# Altium PCB PCB1.PcbDoc (part 1 of 2)
Units mm, origin at the board's own origin, x right, y up, seen from the top; angles counter-clockwise.
Board outline 100.58 x 99.31 mm, 2 copper layers (Top Layer, Bottom Layer); 150 components, 13 nets, 389 pads, 0 vias.
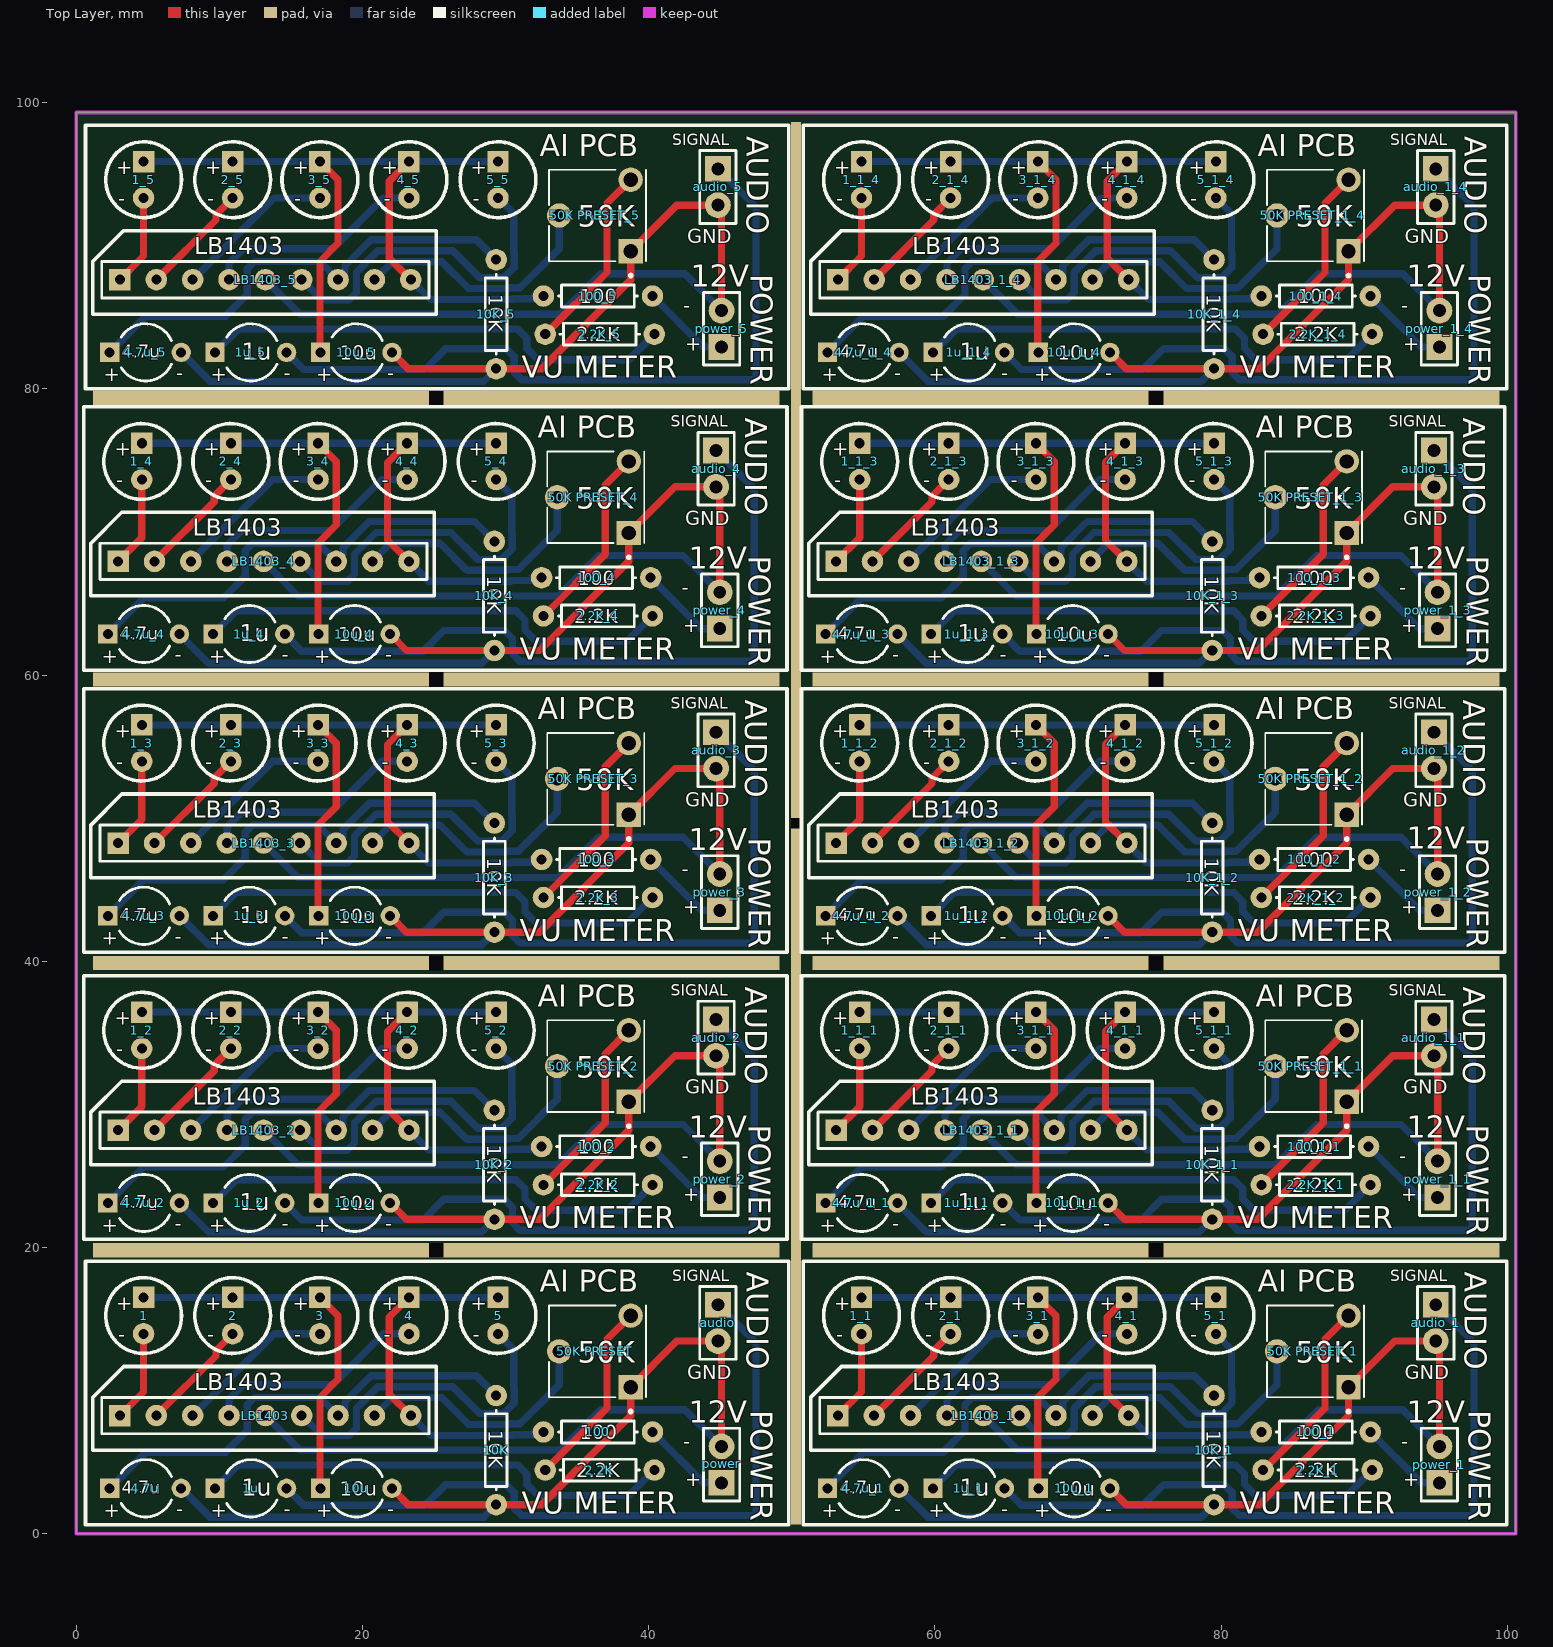
[diagram p0: Top Layer view]
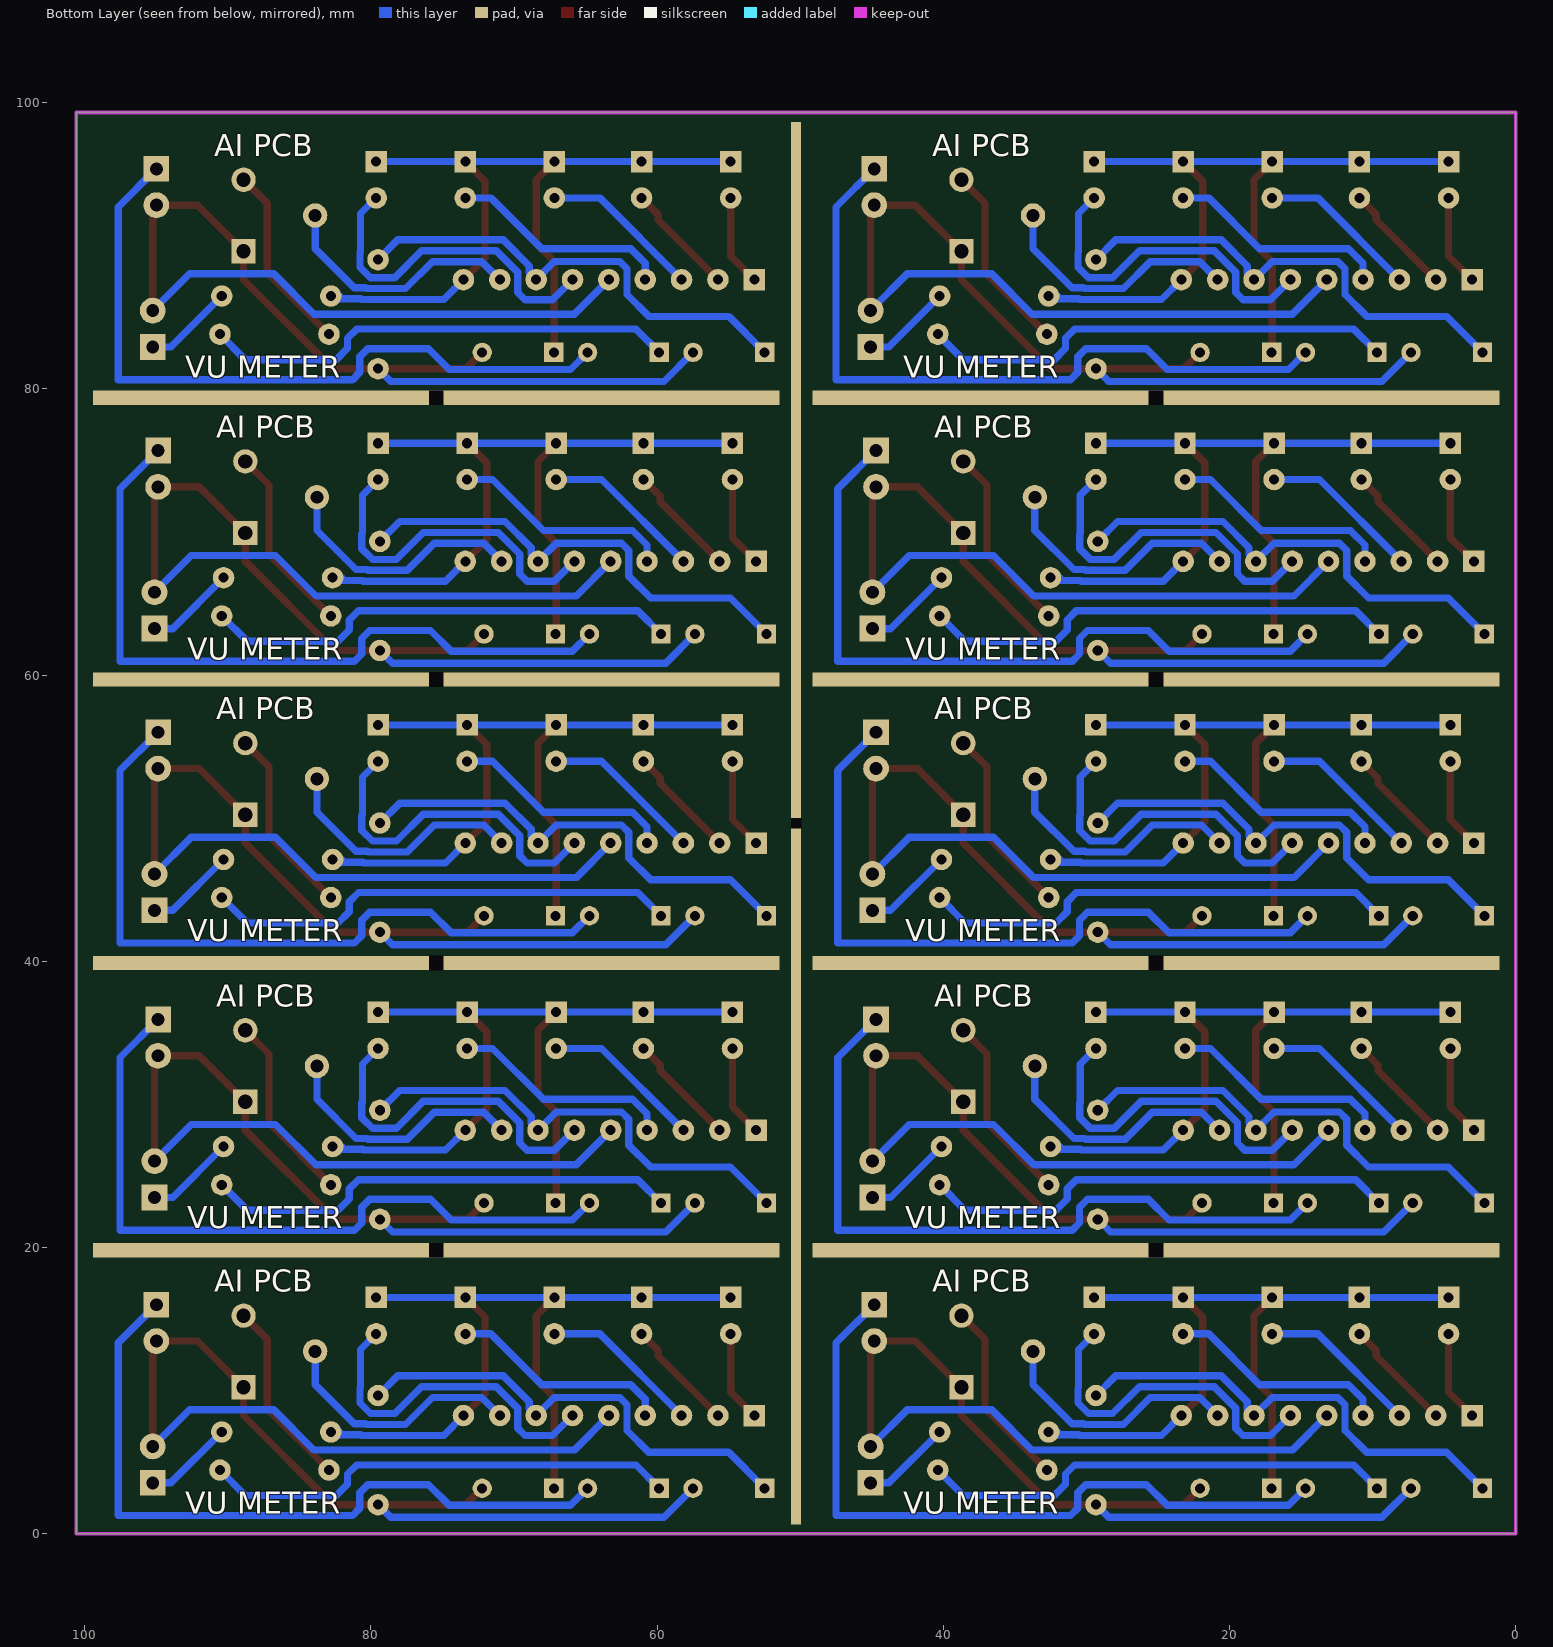
[diagram p1: Bottom Layer view, seen from below]

## Layer stack, top to bottom
Top Solder: solder mask 0.0102, Solder Resist, Dk 3.5
Top Layer: signal copper 0.0356
Dielectric 1: dielectric 0.32, FR-4, Dk 4.8
Bottom Layer: signal copper 0.0356
Bottom Solder: solder mask 0.0102, Solder Resist, Dk 3.5

## Board outline
0,0 0,99.314 100.584,99.314 100.584,0

## Design rules (kind name [scope] priority, off if disabled: settings)
Clearance [All] p1: gap=0.254 ignorepadtopadclearanceinfootprint=FALSE except(0: Arc-Hole Track-Hole SMDPad-Hole THPad-Hole Via-Hole Fill-Hole Poly-Hole Region-Hole Text-Hole)
PolygonConnect [All] p1: connectstyle=Relief reliefconductorwidth=0.254 reliefentries=4 polygonreliefangle="90 Angle" airgapwidth=0.254
RoutingVias [All] p1: holewidth=0.711 width=1.27 viastyle="Through Hole" minholewidth=0.711 minwidth=1.27 maxholewidth=0.711 maxwidth=1.27
SolderMaskExpansion [All] p1: expansion=0.102
Width [All] p1: maxlimit=0.762 minlimit=0.254 preferedwidth=0.508
30 further rules are at their usual default settings.

## Classes and differential pairs
component class Sheet1: 1 1u 2 2.2K 3 4 4.7u 5 10K 10u "50K PRESET" 100 audio LB1403 power

## Components (designator, comment, footprint, x,y, rotation, side; value= is the part's Value field where it differs from the comment)
1 "L-53GD" L-53GD 4.699,15.24 r270 top
1_1 "L-53GD" L-53GD 54.864,15.24 r270 top (schematic designator 1)
1_1_1 "L-53GD" L-53GD 54.737,35.179 r270 top (schematic designator 1)
1_1_2 "L-53GD" L-53GD 54.737,55.245 r270 top (schematic designator 1)
1_1_3 "L-53GD" L-53GD 54.737,74.93 r270 top (schematic designator 1)
1_1_4 "L-53GD" L-53GD 54.864,94.615 r270 top (schematic designator 1)
1_2 "L-53GD" L-53GD 4.572,35.179 r270 top (schematic designator 1)
1_3 "L-53GD" L-53GD 4.572,55.245 r270 top (schematic designator 1)
1_4 "L-53GD" L-53GD 4.572,74.93 r270 top (schematic designator 1)
1_5 "L-53GD" L-53GD 4.699,94.615 r270 top (schematic designator 1)
1u "Cap2" CAPR5-4X5 12.192,3.175 r0 top value=100pF
1u_1 "Cap2" CAPR5-4X5 62.357,3.175 r0 top value=100pF (schematic designator 1u)
1u_1_1 "Cap2" CAPR5-4X5 62.23,23.114 r0 top value=100pF (schematic designator 1u)
1u_1_2 "Cap2" CAPR5-4X5 62.23,43.18 r0 top value=100pF (schematic designator 1u)
1u_1_3 "Cap2" CAPR5-4X5 62.23,62.865 r0 top value=100pF (schematic designator 1u)
1u_1_4 "Cap2" CAPR5-4X5 62.357,82.55 r0 top value=100pF (schematic designator 1u)
1u_2 "Cap2" CAPR5-4X5 12.065,23.114 r0 top value=100pF (schematic designator 1u)
1u_3 "Cap2" CAPR5-4X5 12.065,43.18 r0 top value=100pF (schematic designator 1u)
1u_4 "Cap2" CAPR5-4X5 12.065,62.865 r0 top value=100pF (schematic designator 1u)
1u_5 "Cap2" CAPR5-4X5 12.192,82.55 r0 top value=100pF (schematic designator 1u)
2 "L-53GD" L-53GD 10.922,15.24 r270 top
2.2K "Res1" AXIAL-0.3 36.576,4.445 r180 top value=1K
2.2K_1 "Res1" AXIAL-0.3 86.741,4.445 r180 top value=1K (schematic designator 2.2K)
2.2K_1_1 "Res1" AXIAL-0.3 86.614,24.384 r180 top value=1K (schematic designator 2.2K)
2.2K_1_2 "Res1" AXIAL-0.3 86.614,44.45 r180 top value=1K (schematic designator 2.2K)
2.2K_1_3 "Res1" AXIAL-0.3 86.614,64.135 r180 top value=1K (schematic designator 2.2K)
2.2K_1_4 "Res1" AXIAL-0.3 86.741,83.82 r180 top value=1K (schematic designator 2.2K)
2.2K_2 "Res1" AXIAL-0.3 36.449,24.384 r180 top value=1K (schematic designator 2.2K)
2.2K_3 "Res1" AXIAL-0.3 36.449,44.45 r180 top value=1K (schematic designator 2.2K)
2.2K_4 "Res1" AXIAL-0.3 36.449,64.135 r180 top value=1K (schematic designator 2.2K)
2.2K_5 "Res1" AXIAL-0.3 36.576,83.82 r180 top value=1K (schematic designator 2.2K)
2_1 "L-53GD" L-53GD 61.087,15.24 r270 top (schematic designator 2)
2_1_1 "L-53GD" L-53GD 60.96,35.179 r270 top (schematic designator 2)
2_1_2 "L-53GD" L-53GD 60.96,55.245 r270 top (schematic designator 2)
2_1_3 "L-53GD" L-53GD 60.96,74.93 r270 top (schematic designator 2)
2_1_4 "L-53GD" L-53GD 61.087,94.615 r270 top (schematic designator 2)
2_2 "L-53GD" L-53GD 10.795,35.179 r270 top (schematic designator 2)
2_3 "L-53GD" L-53GD 10.795,55.245 r270 top (schematic designator 2)
2_4 "L-53GD" L-53GD 10.795,74.93 r270 top (schematic designator 2)
2_5 "L-53GD" L-53GD 10.922,94.615 r270 top (schematic designator 2)
3 "L-53GD" L-53GD 17.018,15.24 r270 top
3_1 "L-53GD" L-53GD 67.183,15.24 r270 top (schematic designator 3)
3_1_1 "L-53GD" L-53GD 67.056,35.179 r270 top (schematic designator 3)
3_1_2 "L-53GD" L-53GD 67.056,55.245 r270 top (schematic designator 3)
3_1_3 "L-53GD" L-53GD 67.056,74.93 r270 top (schematic designator 3)
3_1_4 "L-53GD" L-53GD 67.183,94.615 r270 top (schematic designator 3)
3_2 "L-53GD" L-53GD 16.891,35.179 r270 top (schematic designator 3)
3_3 "L-53GD" L-53GD 16.891,55.245 r270 top (schematic designator 3)
3_4 "L-53GD" L-53GD 16.891,74.93 r270 top (schematic designator 3)
3_5 "L-53GD" L-53GD 17.018,94.615 r270 top (schematic designator 3)
4 "L-53GD" L-53GD 23.241,15.24 r270 top
4.7u "Cap2" CAPR5-4X5 4.826,3.175 r0 top value=100pF
4.7u_1 "Cap2" CAPR5-4X5 54.991,3.175 r0 top value=100pF (schematic designator 4.7u)
4.7u_1_1 "Cap2" CAPR5-4X5 54.864,23.114 r0 top value=100pF (schematic designator 4.7u)
4.7u_1_2 "Cap2" CAPR5-4X5 54.864,43.18 r0 top value=100pF (schematic designator 4.7u)
4.7u_1_3 "Cap2" CAPR5-4X5 54.864,62.865 r0 top value=100pF (schematic designator 4.7u)
4.7u_1_4 "Cap2" CAPR5-4X5 54.991,82.55 r0 top value=100pF (schematic designator 4.7u)
4.7u_2 "Cap2" CAPR5-4X5 4.699,23.114 r0 top value=100pF (schematic designator 4.7u)
4.7u_3 "Cap2" CAPR5-4X5 4.699,43.18 r0 top value=100pF (schematic designator 4.7u)
4.7u_4 "Cap2" CAPR5-4X5 4.699,62.865 r0 top value=100pF (schematic designator 4.7u)
4.7u_5 "Cap2" CAPR5-4X5 4.826,82.55 r0 top value=100pF (schematic designator 4.7u)
4_1 "L-53GD" L-53GD 73.406,15.24 r270 top (schematic designator 4)
4_1_1 "L-53GD" L-53GD 73.279,35.179 r270 top (schematic designator 4)
4_1_2 "L-53GD" L-53GD 73.279,55.245 r270 top (schematic designator 4)
4_1_3 "L-53GD" L-53GD 73.279,74.93 r270 top (schematic designator 4)
4_1_4 "L-53GD" L-53GD 73.406,94.615 r270 top (schematic designator 4)
4_2 "L-53GD" L-53GD 23.114,35.179 r270 top (schematic designator 4)
4_3 "L-53GD" L-53GD 23.114,55.245 r270 top (schematic designator 4)
4_4 "L-53GD" L-53GD 23.114,74.93 r270 top (schematic designator 4)
4_5 "L-53GD" L-53GD 23.241,94.615 r270 top (schematic designator 4)
5 "L-53GD" L-53GD 29.464,15.24 r270 top
5_1 "L-53GD" L-53GD 79.629,15.24 r270 top (schematic designator 5)
5_1_1 "L-53GD" L-53GD 79.502,35.179 r270 top (schematic designator 5)
5_1_2 "L-53GD" L-53GD 79.502,55.245 r270 top (schematic designator 5)
5_1_3 "L-53GD" L-53GD 79.502,74.93 r270 top (schematic designator 5)
5_1_4 "L-53GD" L-53GD 79.629,94.615 r270 top (schematic designator 5)
5_2 "L-53GD" L-53GD 29.337,35.179 r270 top (schematic designator 5)
5_3 "L-53GD" L-53GD 29.337,55.245 r270 top (schematic designator 5)
5_4 "L-53GD" L-53GD 29.337,74.93 r270 top (schematic designator 5)
5_5 "L-53GD" L-53GD 29.464,94.615 r270 top (schematic designator 5)
10K "Res1" AXIAL-0.3 29.337,5.842 r90 top value=1K
10K_1 "Res1" AXIAL-0.3 79.502,5.842 r90 top value=1K (schematic designator 10K)
10K_1_1 "Res1" AXIAL-0.3 79.375,25.781 r90 top value=1K (schematic designator 10K)
10K_1_2 "Res1" AXIAL-0.3 79.375,45.847 r90 top value=1K (schematic designator 10K)
10K_1_3 "Res1" AXIAL-0.3 79.375,65.532 r90 top value=1K (schematic designator 10K)
10K_1_4 "Res1" AXIAL-0.3 79.502,85.217 r90 top value=1K (schematic designator 10K)
10K_2 "Res1" AXIAL-0.3 29.21,25.781 r90 top value=1K (schematic designator 10K)
10K_3 "Res1" AXIAL-0.3 29.21,45.847 r90 top value=1K (schematic designator 10K)
10K_4 "Res1" AXIAL-0.3 29.21,65.532 r90 top value=1K (schematic designator 10K)
10K_5 "Res1" AXIAL-0.3 29.337,85.217 r90 top value=1K (schematic designator 10K)
10u "10u" CAPR5-4X5 19.558,3.175 r0 top value=100pF
10u_1 "10u" CAPR5-4X5 69.723,3.175 r0 top value=100pF (schematic designator 10u)
10u_1_1 "10u" CAPR5-4X5 69.596,23.114 r0 top value=100pF (schematic designator 10u)
10u_1_2 "10u" CAPR5-4X5 69.596,43.18 r0 top value=100pF (schematic designator 10u)
10u_1_3 "10u" CAPR5-4X5 69.596,62.865 r0 top value=100pF (schematic designator 10u)
10u_1_4 "10u" CAPR5-4X5 69.723,82.55 r0 top value=100pF (schematic designator 10u)
10u_2 "10u" CAPR5-4X5 19.431,23.114 r0 top value=100pF (schematic designator 10u)
10u_3 "10u" CAPR5-4X5 19.431,43.18 r0 top value=100pF (schematic designator 10u)
10u_4 "10u" CAPR5-4X5 19.431,62.865 r0 top value=100pF (schematic designator 10u)
10u_5 "10u" CAPR5-4X5 19.558,82.55 r0 top value=100pF (schematic designator 10u)
"50K PRESET" "EVN-D8AA03B14" *TRIM_EVN-D8AA03B14 36.235,12.74 r90 top
"50K PRESET_1" "EVN-D8AA03B14" *TRIM_EVN-D8AA03B14 86.4,12.74 r90 top (schematic designator "50K PRESET")
"50K PRESET_1_1" "EVN-D8AA03B14" *TRIM_EVN-D8AA03B14 86.273,32.679 r90 top (schematic designator "50K PRESET")
"50K PRESET_1_2" "EVN-D8AA03B14" *TRIM_EVN-D8AA03B14 86.273,52.745 r90 top (schematic designator "50K PRESET")
"50K PRESET_1_3" "EVN-D8AA03B14" *TRIM_EVN-D8AA03B14 86.273,72.43 r90 top (schematic designator "50K PRESET")
"50K PRESET_1_4" "EVN-D8AA03B14" *TRIM_EVN-D8AA03B14 86.4,92.115 r90 top (schematic designator "50K PRESET")
"50K PRESET_2" "EVN-D8AA03B14" *TRIM_EVN-D8AA03B14 36.108,32.679 r90 top (schematic designator "50K PRESET")
"50K PRESET_3" "EVN-D8AA03B14" *TRIM_EVN-D8AA03B14 36.108,52.745 r90 top (schematic designator "50K PRESET")
"50K PRESET_4" "EVN-D8AA03B14" *TRIM_EVN-D8AA03B14 36.108,72.43 r90 top (schematic designator "50K PRESET")
"50K PRESET_5" "EVN-D8AA03B14" *TRIM_EVN-D8AA03B14 36.235,92.115 r90 top (schematic designator "50K PRESET")
100 "Res1" AXIAL-0.3 36.449,7.112 r0 top value=1K
100_1 "Res1" AXIAL-0.3 86.614,7.112 r0 top value=1K (schematic designator 100)
100_1_1 "Res1" AXIAL-0.3 86.487,27.051 r0 top value=1K (schematic designator 100)
100_1_2 "Res1" AXIAL-0.3 86.487,47.117 r0 top value=1K (schematic designator 100)
100_1_3 "Res1" AXIAL-0.3 86.487,66.802 r0 top value=1K (schematic designator 100)
100_1_4 "Res1" AXIAL-0.3 86.614,86.487 r0 top value=1K (schematic designator 100)
100_2 "Res1" AXIAL-0.3 36.322,27.051 r0 top value=1K (schematic designator 100)
100_3 "Res1" AXIAL-0.3 36.322,47.117 r0 top value=1K (schematic designator 100)
100_4 "Res1" AXIAL-0.3 36.322,66.802 r0 top value=1K (schematic designator 100)
100_5 "Res1" AXIAL-0.3 36.449,86.487 r0 top value=1K (schematic designator 100)
audio "Header 2" HDR1X2 44.831,16.002 r270 top
audio_1 "Header 2" HDR1X2 94.996,16.002 r270 top (schematic designator audio)
audio_1_1 "Header 2" HDR1X2 94.869,35.941 r270 top (schematic designator audio)
audio_1_2 "Header 2" HDR1X2 94.869,56.007 r270 top (schematic designator audio)
audio_1_3 "Header 2" HDR1X2 94.869,75.692 r270 top (schematic designator audio)
audio_1_4 "Header 2" HDR1X2 94.996,95.377 r270 top (schematic designator audio)
audio_2 "Header 2" HDR1X2 44.704,35.941 r270 top (schematic designator audio)
audio_3 "Header 2" HDR1X2 44.704,56.007 r270 top (schematic designator audio)
audio_4 "Header 2" HDR1X2 44.704,75.692 r270 top (schematic designator audio)
audio_5 "Header 2" HDR1X2 44.831,95.377 r270 top (schematic designator audio)
LB1403 "Header 9" HDR1X9 3.048,8.255 r0 top
LB1403_1 "Header 9" HDR1X9 53.213,8.255 r0 top (schematic designator LB1403)
LB1403_1_1 "Header 9" HDR1X9 53.086,28.194 r0 top (schematic designator LB1403)
LB1403_1_2 "Header 9" HDR1X9 53.086,48.26 r0 top (schematic designator LB1403)
LB1403_1_3 "Header 9" HDR1X9 53.086,67.945 r0 top (schematic designator LB1403)
LB1403_1_4 "Header 9" HDR1X9 53.213,87.63 r0 top (schematic designator LB1403)
LB1403_2 "Header 9" HDR1X9 2.921,28.194 r0 top (schematic designator LB1403)
LB1403_3 "Header 9" HDR1X9 2.921,48.26 r0 top (schematic designator LB1403)
LB1403_4 "Header 9" HDR1X9 2.921,67.945 r0 top (schematic designator LB1403)
LB1403_5 "Header 9" HDR1X9 3.048,87.63 r0 top (schematic designator LB1403)
power "Header 2" HDR1X2 45.085,3.556 r90 top
power_1 "Header 2" HDR1X2 95.25,3.556 r90 top (schematic designator power)
power_1_1 "Header 2" HDR1X2 95.123,23.495 r90 top (schematic designator power)
power_1_2 "Header 2" HDR1X2 95.123,43.561 r90 top (schematic designator power)
power_1_3 "Header 2" HDR1X2 95.123,63.246 r90 top (schematic designator power)
power_1_4 "Header 2" HDR1X2 95.25,82.931 r90 top (schematic designator power)
power_2 "Header 2" HDR1X2 44.958,23.495 r90 top (schematic designator power)
power_3 "Header 2" HDR1X2 44.958,43.561 r90 top (schematic designator power)
power_4 "Header 2" HDR1X2 44.958,63.246 r90 top (schematic designator power)
power_5 "Header 2" HDR1X2 45.085,82.931 r90 top (schematic designator power)

## Footprints (in the part's own frame and the unit in brackets; to place one, negate y for a bottom-side part, rotate by r counter-clockwise, add the part's x,y. Pads: shape width x height; smd on the part's side, far side on the other; paste and mask are expansions set on the pad)
*TRIM_EVN-D8AA03B14 [mm]
  rect 1.7x1.7 hole 1: 1(-2.5,-2.5)
  round 1.7 hole 0.9: 2(0,2.5)
  round 1.7 hole 1: 3(2.5,-2.5)
  silkscreen extent -4.3,-3.57 3.2,3.2
AXIAL-0.3 [mm] "Axial Device, Thru-Hole; 2 Leads; 0.3 in Pin Spacing"
  round 1.5 hole 0.7: 1(-3.81,0) 2(3.81,0)
  silkscreen extent -2.77,-0.76 2.77,0.76
CAPR5-4X5 [mm] "Capacitor; 2 Leads"
  rect 1.35x1.35 hole 0.7: 1(-2.5,0)
  round 1.35 hole 0.7: 2(2.5,0)
  silkscreen extent -1.69,-2 1.82,2
HDR1X2 [mm] "Connector; Header; 2 Position"
  rect 1.8x1.8 hole 0.9: 1(0,0)
  round 1.8 hole 0.9: 2(2.54,0)
  silkscreen extent -1.27,-1.27 3.81,1.27
HDR1X9 [mm] "Connector; Header; 9 Position"
  rect 1.5x1.5 hole 0.7: 1(0,0)
  round 1.5 hole 0.7: 2(2.54,0) 3(5.08,0) 4(7.62,0) 5(10.16,0) 6(12.7,0) 7(15.24,0) 8(17.78,0) 9(20.32,0)
  silkscreen extent -1.27,-1.27 21.59,1.27
L-53GD [mm]
  rect 1.5x1.5 hole 0.7: 1(-1.27,0)
  round 1.5 hole 0.7: 2(1.27,0)
  silkscreen extent -2.65,-2.65 2.65,2.65

## Part data
1 1_1 1_1_1 1_1_2 1_1_3 1_1_4 1_2 1_3 1_4 1_5 2 2_1 2_1_1 2_1_2 2_1_3 2_1_4 2_2 2_3 2_4 2_5 3 3_1 3_1_1 3_1_2 3_1_3 3_1_4 3_2 3_3 3_4 3_5 4 4_1 4_1_1 4_1_2 4_1_3 4_1_4 4_2 4_3 4_4 4_5 5 5_1 5_1_1 5_1_2 5_1_3 5_1_4 5_2 5_3 5_4 5_5: "LED", Manufacturer_Name=Kingbright, Mouser Part Number=N/A, RS Part Number=2286004A, Allied_Number=70424261, Allied Price/Stock=http://www.alliedelec.com/kingbright-l-53gd/70424261/, Datasheet Link=http://docs-emea.rs-online.com/webdocs/151e/0900766b8151e408.pdf, Manufacturer_Part_Number=L-53GD, Mouser Price/Stock=https://www.mouser.com/Search/Refine.aspx?Keyword=N%2FA, RS Price/Stock=http://uk.rs-online.com/web/p/products/2286004A
1u 1u_1 1u_1_1 1u_1_2 1u_1_3 1u_1_4 1u_2 1u_3 1u_4 1u_5 4.7u 4.7u_1 4.7u_1_1 4.7u_1_2 4.7u_1_3 4.7u_1_4 4.7u_2 4.7u_3 4.7u_4 4.7u_5: "Capacitor", PackageDescription="Capacitor; 2 Leads", PackageReference=CAPR5-4X5, Published=23-Sep-2002, Publisher="Altium Limited"
2.2K 2.2K_1 2.2K_1_1 2.2K_1_2 2.2K_1_3 2.2K_1_4 2.2K_2 2.2K_3 2.2K_4 2.2K_5 10K 10K_1 10K_1_1 10K_1_2 10K_1_3 10K_1_4 10K_2 10K_3 10K_4 10K_5 100 100_1 100_1_1 100_1_2 100_1_3 100_1_4 100_2 100_3 100_4 100_5: "Resistor", LatestRevisionDate=17-Jul-2002, LatestRevisionNote="Re-released for DXP Platform.", PackageDescription="Axial Device, Thru-Hole; 2 Leads; 0.3 in Pin Spacing", PackageReference=AXIAL-0.3, Published=8-Jun-2000, Publisher="Altium Limited"
10u 10u_1 10u_1_1 10u_1_2 10u_1_3 10u_1_4 10u_2 10u_3 10u_4 10u_5: library part Cap2, "Capacitor", PackageDescription="Capacitor; 2 Leads", PackageReference=CAPR5-4X5, Published=23-Sep-2002, Publisher="Altium Limited"
"50K PRESET" "50K PRESET_1" "50K PRESET_1_1" "50K PRESET_1_2" "50K PRESET_1_3" "50K PRESET_1_4" "50K PRESET_2" "50K PRESET_3" "50K PRESET_4" "50K PRESET_5": "Trimmer; Carbon; Rest 10 Kilohms; PCB; 1 Turn; Pwr-Rtg 0.1 W; Linear; Top Adj; 6 mm SQ", Package="PQFP-44 Panasonic", Availability=Unavailable, MF="Panasonic Electronic", MP=EVN-D8AA03B14, Price=None, SnapEDA_Link=https://www.snapeda.com/parts/EVN-D8AA03B14/Panasonic%20Electronic%20Components/view-part/?ref=snap
audio audio_1 audio_1_1 audio_1_2 audio_1_3 audio_1_4 audio_2 audio_3 audio_4 audio_5 power power_1 power_1_1 power_1_2 power_1_3 power_1_4 power_2 power_3 power_4 power_5: "Header, 2-Pin", LatestRevisionDate=17-Jul-2002, LatestRevisionNote="Re-released for DXP Platform.", Publisher="Altium Limited"
LB1403 LB1403_1 LB1403_1_1 LB1403_1_2 LB1403_1_3 LB1403_1_4 LB1403_2 LB1403_3 LB1403_4 LB1403_5: "Header, 9-Pin", LatestRevisionDate=17-Jul-2002, LatestRevisionNote="Re-released for DXP Platform.", Publisher="Altium Limited"

## Free pads (board coordinates)
  rect 0.7x98 hole 0.7 square: 2(50.292,49.657)
  rect 48x1 hole 1 square: 3(25.146,19.812) 3(25.146,39.878) 3(25.146,59.69) 3(25.146,79.375) 3(75.438,19.812) 3(75.438,39.878) 3(75.438,59.69) 3(75.438,79.375)

## Nets (pads, with @x,y where several pads share a name; then routed paths per layer and width w, separated by ;. In a path a pad name is that pad's centre, name@x,y a point inside that pad or via, vN(x,y) a via of type N, cw(c..) or ccw(c..) an arc to the next point about the centre after c; other vN are vias at no path point)
Net1_1: 1.1 2.1 3.1 4.1 5.1 10u.1 100.1 LB1403.9 | length 58.7
  Top Layer w0.508: 3.1@17.018,16.51 18.288,15.24 18.288,10.795 17.018,9.525 17.018,3.215 10u.1@17.058,3.175 ; 4.1@23.241,16.51 21.869,15.138 21.869,9.754 LB1403.9@23.368,8.255
  Bottom Layer w0.508: 1.1@4.699,16.51 2.1@10.922,16.51 3.1@17.018,16.51 4.1@23.241,16.51 5.1@29.464,16.51 ; LB1403.9@23.368,8.255 24.753,6.87 30.489,6.87 30.539,6.92 31.992,6.92 31.992,7.112 100.1@32.639,7.112
Net1_2: 1.2 LB1403.1 | length 6.4
  Top Layer w0.508: LB1403.1@3.048,8.255 4.699,9.906 1.2@4.699,13.97
Net1u_1: 1u.1 2.2K.1 | length 33.4
  Bottom Layer w0.508: 1u.1@9.692,3.175 11.318,4.801 30.834,4.801 31.47,4.165 31.47,3.455 32.258,2.667 38.608,2.667 2.2K.1@40.386,4.445
Net1u_2: 1u.2 audio.1 | length 51.3
  Bottom Layer w0.508: 1u.2@14.692,3.175 15.886,1.981 24.359,1.981 25.806,3.429 30.048,3.429 30.607,2.87 30.607,1.778 31.115,1.27 47.498,1.27 47.498,13.335 audio.1@44.831,16.002
Net2.2K_2: 2.2K.2 "50K PRESET.3" | length 13.3
  Top Layer w0.508: 2.2K.2@32.766,4.445 37.084,8.763 37.084,13.589 38.735,15.24
Net2_2: 2.2 LB1403.2 | length 7.9
  Top Layer w0.508: LB1403.2@5.588,8.255 9.754,12.421 9.754,12.802 2.2@10.922,13.97
Net3_2: 3.2 LB1403.3 | length 11.3
  Bottom Layer w0.508: LB1403.3@8.128,8.255 13.843,13.97 3.2@17.018,13.97
Net4.7u_1: 4.7u.1 10K.2 LB1403.7 | length 33.2
  Bottom Layer w0.508: 4.7u.1@2.326,3.175 4.841,5.69 10.414,5.69 11.938,7.214 11.938,9.017 12.446,9.525 17.018,9.525 LB1403.7@18.288,8.255 18.767,8.734 18.767,9.217 20.587,11.037 27.952,11.037 10K.2@29.337,9.652
Net4.7u_2: 4.7u.2 10K.1 10u.2 "50K PRESET.1" audio.2 LB1403.5 power.2 | length 94.9
  Top Layer w0.508: 10u.2@22.058,3.175 23.201,2.032 10K.1@29.337,2.032 32.512,2.032 38.735,8.255 38.735,10.24 41.957,13.462 audio.2@44.831,13.462 45.085,13.208 power.2@45.085,6.096
  Bottom Layer w0.508: 4.7u.2@7.326,3.175 9.358,1.143 28.448,1.143 10K.1@29.337,2.032 ; LB1403.5@13.208,8.255 15.621,5.842 33.807,5.842 36.627,8.661 42.52,8.661 power.2@45.085,6.096
Net4_2: 4.2 LB1403.4 | length 15.6
  Bottom Layer w0.508: LB1403.4@10.668,8.255 10.668,9.398 11.684,10.414 17.907,10.414 21.463,13.97 4.2@23.241,13.97
Net5_2: 5.2 LB1403.6 | length 24.1
  Bottom Layer w0.508: LB1403.6@15.748,8.255 17.145,6.858 19.062,6.858 19.57,7.366 19.57,8.776 21.069,10.275 26.298,10.275 28.179,8.394 29.858,8.394 30.595,9.131 30.595,10.173 30.556,10.212 30.556,12.878 5.2@29.464,13.97
"Net50K PRESET_2": "50K PRESET.2" LB1403.8 | length 17.7
  Bottom Layer w0.508: LB1403.8@20.828,8.255 22.086,9.513 25.536,9.513 27.417,7.632 30.174,7.632 30.224,7.682 31.003,7.682 33.735,10.414 33.735,12.74
Net100_2: 100.2 power.1 | length 6.3
  Bottom Layer w0.508: 100.2@40.259,7.112 43.815,3.556 power.1@45.085,3.556
pads on no net: 1_1.1 1_1.2 1_1_1.1 1_1_1.2 1_1_2.1 1_1_2.2 1_1_3.1 1_1_3.2 1_1_4.1 1_1_4.2 1_2.1 1_2.2 1_3.1 1_3.2 1_4.1 1_4.2 1_5.1 1_5.2 1u_1.1 1u_1.2 1u_1_1.1 1u_1_1.2 1u_1_2.1 1u_1_2.2 1u_1_3.1 1u_1_3.2 1u_1_4.1 1u_1_4.2 1u_2.1 1u_2.2 1u_3.1 1u_3.2 1u_4.1 1u_4.2 1u_5.1 1u_5.2 2.2K_1.1 2.2K_1.2 2.2K_1_1.1 2.2K_1_1.2 2.2K_1_2.1 2.2K_1_2.2 2.2K_1_3.1 2.2K_1_3.2 2.2K_1_4.1 2.2K_1_4.2 2.2K_2.1 2.2K_2.2 2.2K_3.1 2.2K_3.2 2.2K_4.1 2.2K_4.2 2.2K_5.1 2.2K_5.2 2_1.1 2_1.2 2_1_1.1 2_1_1.2 2_1_2.1 2_1_2.2 2_1_3.1 2_1_3.2 2_1_4.1 2_1_4.2 2_2.1 2_2.2 2_3.1 2_3.2 2_4.1 2_4.2 2_5.1 2_5.2 3_1.1 3_1.2 3_1_1.1 3_1_1.2 3_1_2.1 3_1_2.2 3_1_3.1 3_1_3.2 3_1_4.1 3_1_4.2 3_2.1 3_2.2 3_3.1 3_3.2 3_4.1 3_4.2 3_5.1 3_5.2 4.7u_1.1 4.7u_1.2 4.7u_1_1.1 4.7u_1_1.2 4.7u_1_2.1 4.7u_1_2.2 4.7u_1_3.1 4.7u_1_3.2 4.7u_1_4.1 4.7u_1_4.2 4.7u_2.1 4.7u_2.2 4.7u_3.1 4.7u_3.2 4.7u_4.1 4.7u_4.2 4.7u_5.1 4.7u_5.2 4_1.1 4_1.2 4_1_1.1 4_1_1.2 4_1_2.1 4_1_2.2 4_1_3.1 4_1_3.2 4_1_4.1 4_1_4.2 4_2.1 4_2.2 4_3.1 4_3.2 4_4.1 4_4.2 4_5.1 4_5.2 5_1.1 5_1.2 5_1_1.1 5_1_1.2 5_1_2.1 5_1_2.2 5_1_3.1 5_1_3.2 5_1_4.1 5_1_4.2 5_2.1 5_2.2 5_3.1 5_3.2 5_4.1 5_4.2 5_5.1 5_5.2 10K_1.1 10K_1.2 10K_1_1.1 10K_1_1.2 10K_1_2.1 10K_1_2.2 10K_1_3.1 10K_1_3.2 10K_1_4.1 10K_1_4.2 10K_2.1 10K_2.2 10K_3.1 10K_3.2 10K_4.1 10K_4.2 10K_5.1 10K_5.2 10u_1.1 10u_1.2 10u_1_1.1 10u_1_1.2 10u_1_2.1 10u_1_2.2 10u_1_3.1 10u_1_3.2 10u_1_4.1 10u_1_4.2 10u_2.1 10u_2.2 10u_3.1 10u_3.2 10u_4.1 10u_4.2 10u_5.1 10u_5.2 100_1.1 100_1.2 100_1_1.1 100_1_1.2 100_1_2.1 100_1_2.2 100_1_3.1 100_1_3.2 100_1_4.1 100_1_4.2 100_2.1 100_2.2 100_3.1 100_3.2 100_4.1 100_4.2 100_5.1 100_5.2 "50K PRESET_1.1" "50K PRESET_1.2" "50K PRESET_1.3" "50K PRESET_1_1.1" "50K PRESET_1_1.2" "50K PRESET_1_1.3" "50K PRESET_1_2.1" "50K PRESET_1_2.2" "50K PRESET_1_2.3" "50K PRESET_1_3.1" "50K PRESET_1_3.2" "50K PRESET_1_3.3" "50K PRESET_1_4.1" "50K PRESET_1_4.2" "50K PRESET_1_4.3" "50K PRESET_2.1" "50K PRESET_2.2" "50K PRESET_2.3" "50K PRESET_3.1" "50K PRESET_3.2" "50K PRESET_3.3" "50K PRESET_4.1" "50K PRESET_4.2" "50K PRESET_4.3" "50K PRESET_5.1" "50K PRESET_5.2" "50K PRESET_5.3" audio_1.1 audio_1.2 audio_1_1.1 audio_1_1.2 audio_1_2.1 audio_1_2.2 audio_1_3.1 audio_1_3.2 audio_1_4.1 audio_1_4.2 audio_2.1 audio_2.2 audio_3.1 audio_3.2 audio_4.1 audio_4.2 audio_5.1 audio_5.2 LB1403_1.1 LB1403_1.2 LB1403_1.3 LB1403_1.4 LB1403_1.5 LB1403_1.6 LB1403_1.7 LB1403_1.8 LB1403_1.9 LB1403_1_1.1 LB1403_1_1.2 LB1403_1_1.3 LB1403_1_1.4 LB1403_1_1.5 LB1403_1_1.6 LB1403_1_1.7 LB1403_1_1.8 LB1403_1_1.9 LB1403_1_2.1 LB1403_1_2.2 LB1403_1_2.3 LB1403_1_2.4 LB1403_1_2.5 LB1403_1_2.6 LB1403_1_2.7 LB1403_1_2.8 LB1403_1_2.9 LB1403_1_3.1 LB1403_1_3.2 LB1403_1_3.3 LB1403_1_3.4 LB1403_1_3.5 LB1403_1_3.6 LB1403_1_3.7 LB1403_1_3.8 LB1403_1_3.9 LB1403_1_4.1 LB1403_1_4.2 LB1403_1_4.3 LB1403_1_4.4 LB1403_1_4.5 LB1403_1_4.6 LB1403_1_4.7 LB1403_1_4.8 LB1403_1_4.9 LB1403_2.1 LB1403_2.2 LB1403_2.3 LB1403_2.4 LB1403_2.5 LB1403_2.6 LB1403_2.7 LB1403_2.8 LB1403_2.9 LB1403_3.1 LB1403_3.2 LB1403_3.3 LB1403_3.4 LB1403_3.5 LB1403_3.6 LB1403_3.7 LB1403_3.8 LB1403_3.9 LB1403_4.1 LB1403_4.2 LB1403_4.3 LB1403_4.4 LB1403_4.5 LB1403_4.6 LB1403_4.7 LB1403_4.8 LB1403_4.9 LB1403_5.1 LB1403_5.2 LB1403_5.3 LB1403_5.4 LB1403_5.5 LB1403_5.6 LB1403_5.7 LB1403_5.8 LB1403_5.9 power_1.1 power_1.2 power_1_1.1 power_1_1.2 power_1_2.1 power_1_2.2 power_1_3.1 power_1_3.2 power_1_4.1 power_1_4.2 power_2.1 power_2.2 power_3.1 power_3.2 power_4.1 power_4.2 power_5.1 power_5.2